# Altium PCB amirali_hasanadeh.PcbDoc
Units mm, origin at the board's own origin, x right, y up, seen from the top; angles counter-clockwise.
Board outline 105.41 x 72.64 mm, 2 copper layers (Top Layer, Bottom Layer); 28 components, 23 nets, 114 pads, 13 vias.
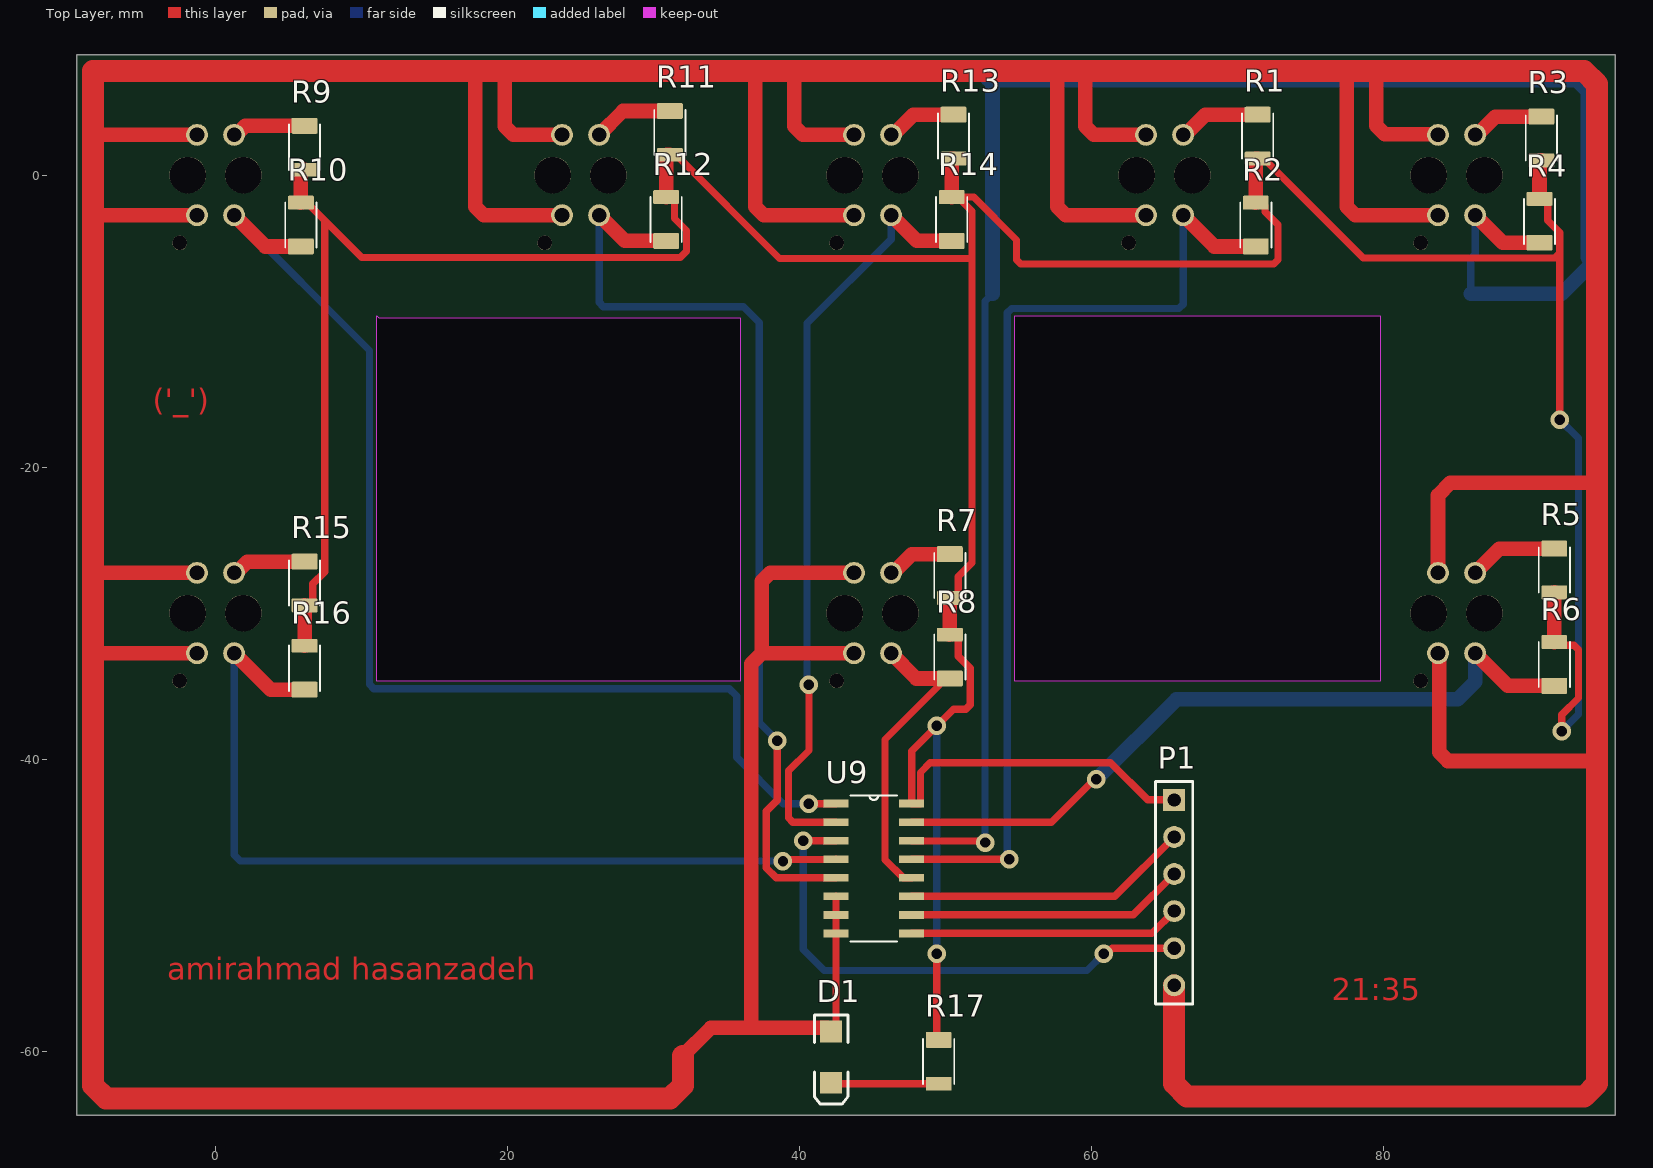
[diagram p0: Top Layer view]
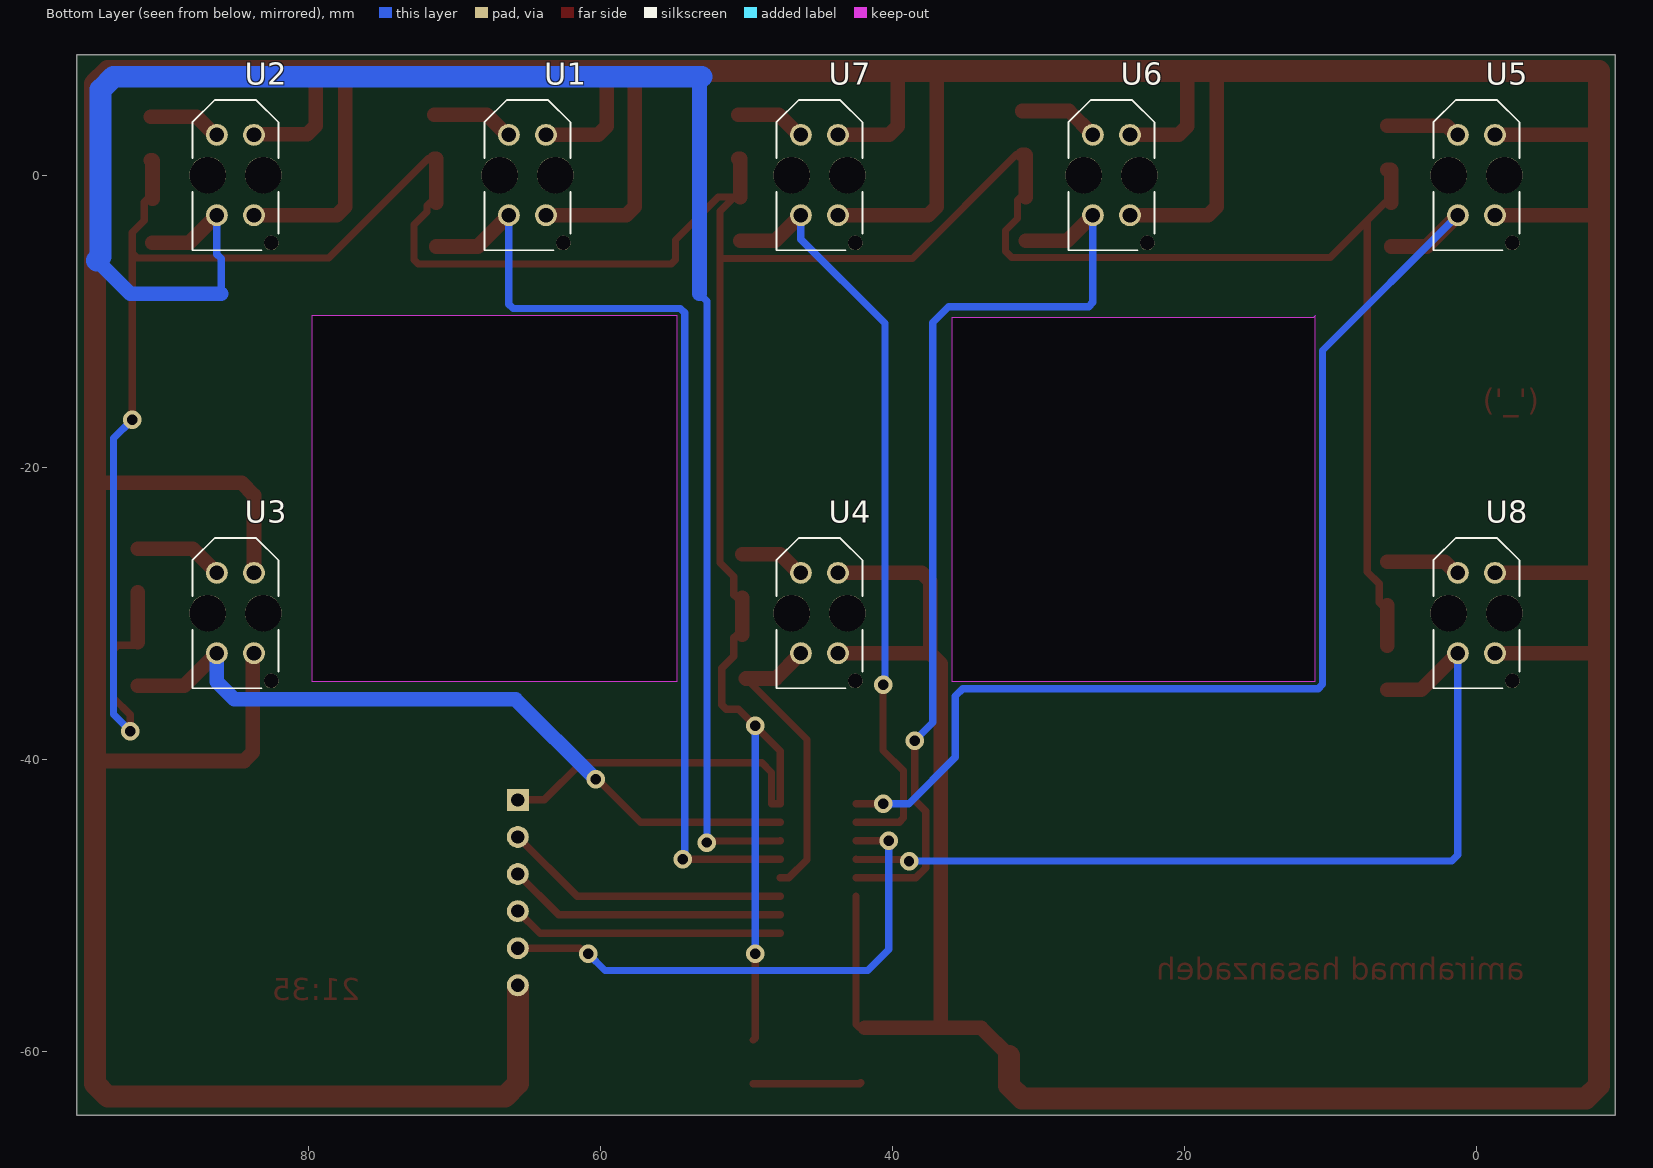
[diagram p1: Bottom Layer view, seen from below]
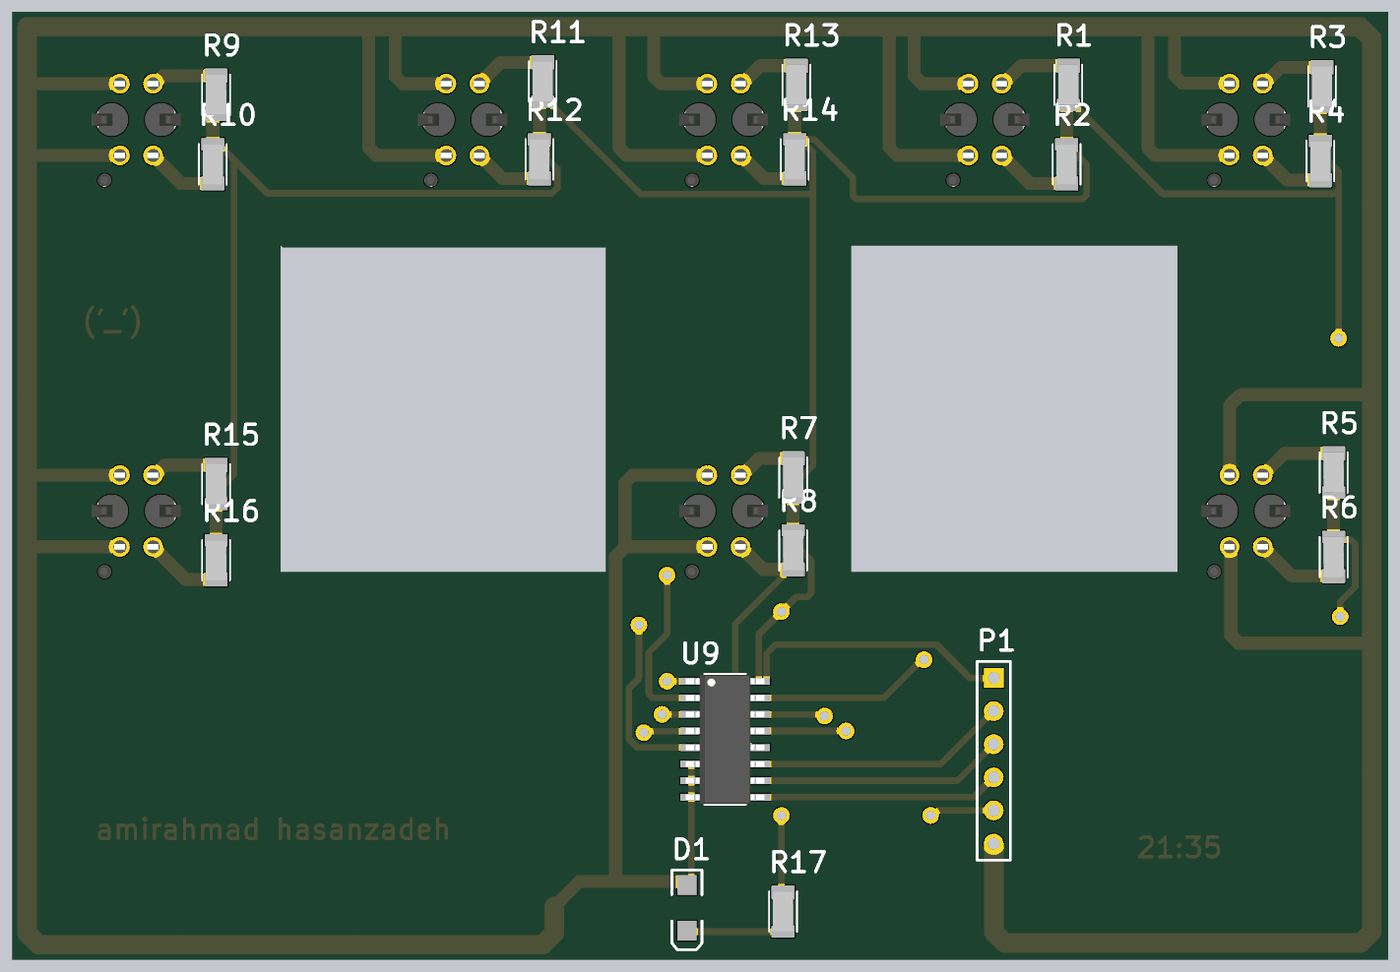
[diagram p2: 3D render of the assembled board from above, using the file's embedded part models]
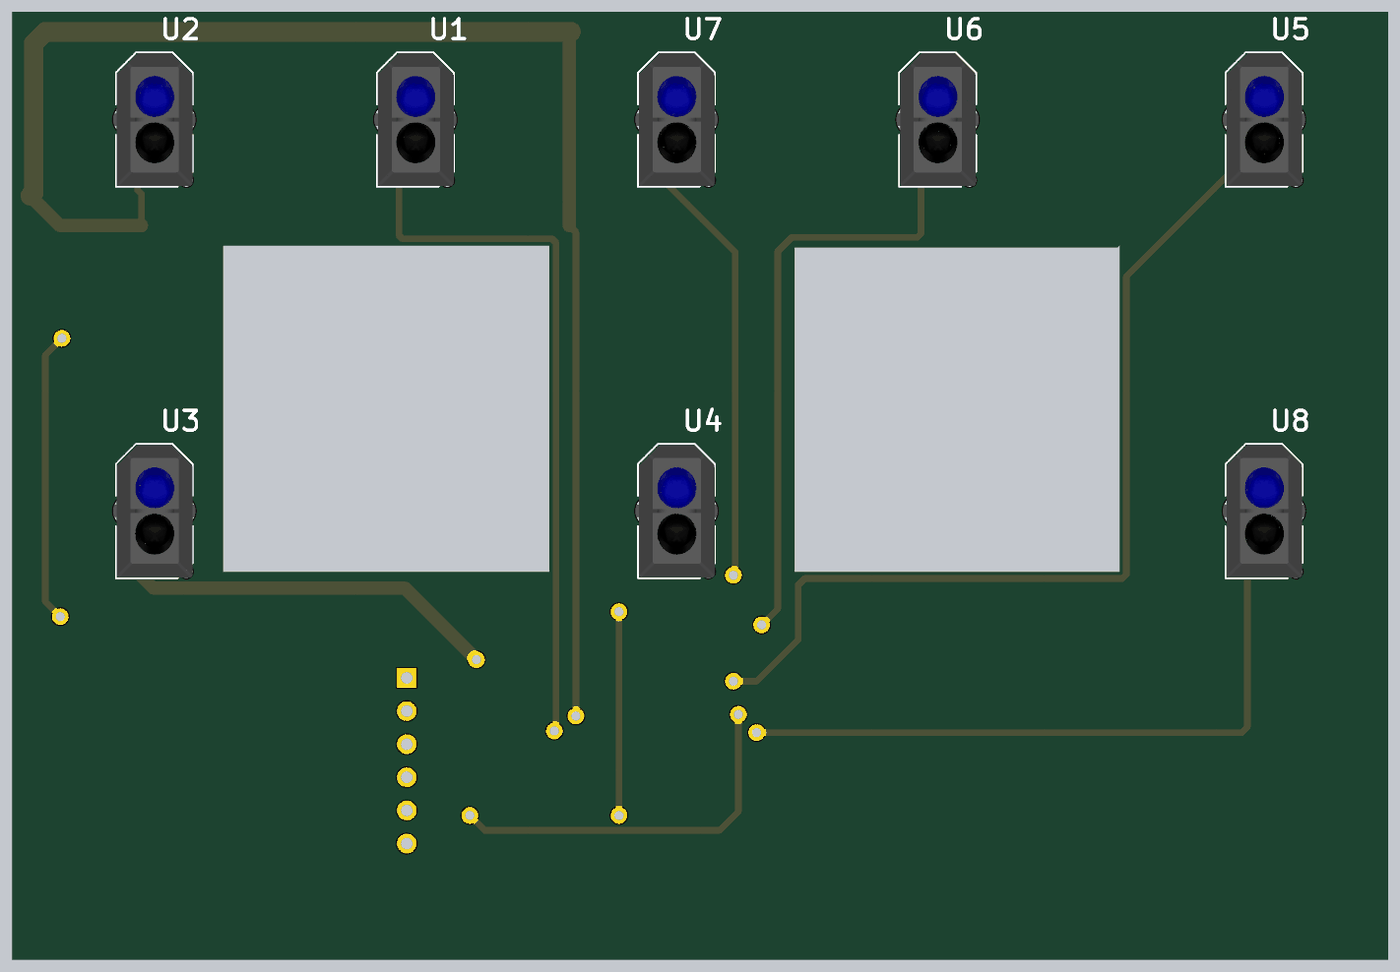
[diagram p3: 3D render of the assembled board from below, using the file's embedded part models]

## Layer stack, top to bottom
Top Solder: solder mask 0.0102, Solder Resist, Dk 3.5
Top Layer: signal copper 0.0356
Dielectric 1: dielectric 0.32, FR-4, Dk 4.8
Bottom Layer: signal copper 0.0356
Bottom Solder: solder mask 0.0102, Solder Resist, Dk 3.5

## Board outline
-9.525,-64.389 95.885,-64.389 95.885,8.255 -9.525,8.255
cut-out: 54.737,-9.652 79.756,-9.652 79.756,-34.671 54.737,-34.671
cut-out: 11.049,-9.652 11.176,-9.779 35.941,-9.779 35.941,-34.671 11.049,-34.671

## Design rules (kind name [scope] priority, off if disabled: settings)
Clearance [All] p1: gap=0.254 ignorepadtopadclearanceinfootprint=FALSE except(0: Arc-Hole Track-Hole SMDPad-Hole THPad-Hole Via-Hole Fill-Hole Poly-Hole Region-Hole Text-Hole)
PolygonConnect [All] p1: connectstyle=Relief reliefconductorwidth=0.254 reliefentries=4 polygonreliefangle="90 Angle" airgapwidth=0.254
RoutingVias [All] p1: holewidth=0.711 width=1.27 viastyle="Through Hole" minholewidth=0.711 minwidth=1.27 maxholewidth=0.711 maxwidth=1.27
SolderMaskExpansion [All] p1: expansion=0.102 istentingtop=FALSE
Width [All] p1: maxlimit=1.5 minlimit=0.5 preferedwidth=1 minimp=50.000000 maximp=50.000000 favimp=50.000000
30 further rules are at their usual default settings.

## Components (designator, comment, footprint, x,y, rotation, side; value= is the part's Value field where it differs from the comment)
D1 "LED2" 3.2X1.6X1.1 42.164,-60.424 r270 top
P1 "Header 6" HDR1X6 65.659,-42.799 r270 top
R1 "4-1879462-2" RESC3115X65N 71.374,2.667 r270 top
R2 "4-1879462-2" RESC3115X65N 71.247,-3.429 r90 top
R3 "4-1879462-2" RESC3115X65N 90.805,2.54 r270 top
R4 "4-1879462-2" RESC3115X65N 90.678,-3.175 r90 top
R5 "4-1879462-2" RESC3115X65N 91.694,-27.051 r270 top
R6 "4-1879462-2" RESC3115X65N 91.694,-33.528 r90 top
R7 "4-1879462-2" RESC3115X65N 50.292,-27.432 r270 top
R8 "4-1879462-2" RESC3115X65N 50.292,-33.02 r90 top
R9 "4-1879462-2" RESC3115X65N 6.096,1.905 r270 top
R10 "4-1879462-2" RESC3115X65N 5.842,-3.429 r90 top
R11 "4-1879462-2" RESC3115X65N 31.115,2.921 r270 top
R12 "4-1879462-2" RESC3115X65N 30.861,-3.048 r90 top
R13 "4-1879462-2" RESC3115X65N 50.546,2.667 r270 top
R14 "4-1879462-2" RESC3115X65N 50.419,-3.048 r90 top
R15 "4-1879462-2" RESC3115X65N 6.096,-27.94 r270 top
R16 "4-1879462-2" RESC3115X65N 6.096,-33.782 r90 top
R17 "4-1879462-2" RESC3115X65N 49.53,-60.706 r270 top
U1 "TCRT5000" OPTO_TCRT5000 65,0 r90 bottom
U2 "TCRT5000" OPTO_TCRT5000 85,0 r90 bottom
U3 "TCRT5000" OPTO_TCRT5000 85,-30 r90 bottom
U4 "TCRT5000" OPTO_TCRT5000 45,-30 r90 bottom
U5 "TCRT5000" OPTO_TCRT5000 0,0 r90 bottom
U6 "TCRT5000" OPTO_TCRT5000 25,0 r90 bottom
U7 "TCRT5000" OPTO_TCRT5000 45,0 r90 bottom
U8 "TCRT5000" OPTO_TCRT5000 0,-30 r90 bottom
U9 "74HC4051D" SOIC127P600X175-16N 45.085,-47.498 r0 top

## Footprints (in the part's own frame and the unit in brackets; to place one, negate y for a bottom-side part, rotate by r counter-clockwise, add the part's x,y. Pads: shape width x height; smd on the part's side, far side on the other; paste and mask are expansions set on the pad)
3.2X1.6X1.1 [mm] "SMT LED; 2 Flat Leads"
  rect 1.5x1.5 smd: 1(-1.75,0) 2(1.75,0)
  silkscreen extent -2.9,-1.15 3.2,1.15
HDR1X6 [mm] "Connector; Header; 6 Position"
  rect 1.5x1.5 hole 0.9: 1(0,0)
  round 1.5 hole 0.9: 2(2.54,0) 3(5.08,0) 4(7.62,0) 5(10.16,0) 6(12.7,0)
  silkscreen extent -1.27,-1.27 13.97,1.27
OPTO_TCRT5000 [mm]
  round 1.5 hole 1: A(2.75,1.27) CATH(2.75,-1.27) COLL(-2.75,1.27) E(-2.75,-1.27)
  round 1 hole 1 unplated: ""(-4.65,-2.45)
  round 2.5 hole 2.5 unplated: ""(0,-1.9) ""(0,1.9)
  silkscreen extent -5.15,-2.95 5.15,2.95, body extent -5.1,-3.43 5.1,3.37, height 7.2
RESC3115X65N [mm]
  rrect14% 1.09x1.77 smd: 1(-1.465,0)
  rrect14% 0.94x1.77 smd: 2(1.54,0)
  silkscreen extent -1.55,-1.06 1.55,1.06, body extent -1.55,-0.77 1.55,0.77, height 0.53
SOIC127P600X175-16N [mil]
  rect 67x21 smd: 1(-102,175) 2(-102,125) 3(-102,75) 4(-102,25) 5(-102,-25) 6(-102,-75) 7(-102,-125) 8(-102,-175) 9(102,-175) 10(102,-125) 11(102,-75) 12(102,-25) 13(102,25) 14(102,75) 15(102,125) 16(102,175)
  silkscreen extent -62,-197 62,197, body extent -118,-195 118,195, height 69

## Part data
D1: "Typical RED, GREEN, YELLOW, AMBER GaAs LED", LatestRevisionDate=17-Jul-2002, LatestRevisionNote="Re-released for DXP Platform.", PackageDescription="SM LED; 2 Flat Leads", PackageReference=3.2X1.6X1.1, PackageVersion=Feb-2002, Published=8-Jun-2000, Publisher="Altium Limited"
P1: "Header, 6-Pin", LatestRevisionDate=17-Jul-2002, LatestRevisionNote="Re-released for DXP Platform.", Publisher="Altium Limited"
R1 R2 R3 R4 R5 R6 R7 R8 R9 R10 R11 R12 R13 R14 R15 R16 R17: "RES 0.82 OHM 1% 1/4W 1206", Package=1206, Power_Rating=".25 W", Resistance=82, Tolerance=1%, Availability="In Stock", Check_prices=https://www.snapeda.com/parts/4-1879462-2/TE+Connectivity/view-part/?ref=eda, EU_RoHS_Compliance="Compliant with Exemptions", MF="TE Connectivity", MP=4-1879462-2, Price=None, SnapEDA_Link=https://www.snapeda.com/parts/4-1879462-2/TE+Connectivity/view-part/?ref=snap
U1 U2 U3 U4 U5 U6 U7 U8: "950 nm 60 mA Through Hole Reflective Optical Sensor with Transistor Output", Package=None, Availability=Unavailable, MP=TCRT5000, Price=None
U9: "1 Circuit IC Switch 8:1 130Ohm 16-SOIC", Package="SOIC-16 Toshiba", Availability="In Stock", Check_prices=https://www.snapeda.com/parts/74HC4051D/Toshiba/view-part/?ref=eda, MF=Toshiba, MP=74HC4051D, Price=None, Purchase-URL=https://pricing.snapeda.com/search/part/74HC4051D/?ref=eda, SnapEDA_Link=https://www.snapeda.com/parts/74HC4051D/Toshiba/view-part/?ref=snap

## Via types
v1: diameter 1.27, hole 0.711, Top Layer to Bottom Layer, 13 vias

## Nets (pads, with @x,y where several pads share a name; then routed paths per layer and width w, separated by ;. In a path a pad name is that pad's centre, name@x,y a point inside that pad or via, vN(x,y) a via of type N, cw(c..) or ccw(c..) an arc to the next point about the centre after c; other vN are vias at no path point)
5: P1.1 R1.2 R2.2 R3.2 R4.2 R5.2 R6.2 R7.2 R8.2 R9.2 R10.2 R11.2 R12.2 R13.2 R14.2 R15.2 R16.2 R17.1 U9.16 | length 292.3
  Top Layer w0.5: R10.2 6.257,-1.889 7.485,-3.117 ; R15.2 6.445,-29.48 6.665,-29.26 6.665,-28.004 7.485,-27.184 7.485,-3.117 ; R12.2 31.21,-1.508 31.43,-1.728 31.43,-2.984 32.25,-3.804 32.25,-5.222 31.818,-5.654 10.022,-5.654 7.485,-3.117 ; R11.2 31.53,1.381 38.626,-5.715 51.808,-5.715 ; v1(49.403,-53.344) 49.403,-59.114 R17.1 ; R8.2 50.641,-31.48 50.861,-31.7 50.861,-32.956 51.681,-33.776 51.681,-36.291 51.388,-36.584 50.538,-36.584 47.676,-39.446 U9.16 48.26,-43.053 48.277,-43.036 48.277,-40.918 48.935,-40.259 61.301,-40.259 63.841,-42.799 P1.1 ; R7.2 50.641,-28.972 50.861,-28.752 50.861,-27.496 51.808,-26.549 51.808,-5.715 ; R14.2 R14.2@50.834,-1.508 ; R2.2 71.662,-1.889 71.882,-2.109 71.882,-2.524 72.771,-3.413 72.771,-5.803 72.478,-6.096 55.157,-6.096 54.864,-5.803 54.864,-4.445 51.927,-1.508 R14.2@50.834,-1.508 ; R1.2 71.789,1.127 78.605,-5.689 91.727,-5.689 92.067,-5.349 ; R4.2 91.027,-1.635 91.247,-1.855 91.247,-3.111 92.075,-3.939 v1(92.075,-16.764) ; R6.2 91.914,-32.208 93.041,-32.208 93.345,-32.512 93.345,-35.814 92.202,-36.957 v1(92.202,-38.1) ; R14.2@50.834,-1.508 51.808,-2.482 51.808,-5.715
  Top Layer w1: R10.2 5.842,0.335 5.872,0.365 R9.2 ; R16.2 R15.2 ; R12.2 30.861,1.351 30.891,1.381 R11.2 ; R8.2 R7.2 ; R14.2 50.419,1.097 50.449,1.127 R13.2 ; R2.2 71.247,1.097 71.277,1.127 R1.2 ; R4.2 90.678,0.97 90.708,1 R3.2 ; R6.2 R5.2
  Bottom Layer w0.5: v1(49.403,-53.344) v1(49.403,-37.719) ; v1(92.075,-16.764) 93.345,-18.034 93.345,-36.931 92.202,-38.074 v1(92.202,-38.1)
GND: D1.1 P1.6 U1.CATH U1.E U2.CATH U2.E U3.CATH U3.E U4.CATH U4.E U5.CATH U5.E U6.CATH U6.E U7.CATH U7.E U8.CATH U8.E U9.6 U9.7 U9.8 | length 543.9
  Top Layer w0.5: D1.1@41.885,-58.395 42.274,-58.395 42.494,-58.174 U9.8 U9.7 U9.6
  Top Layer w1: -8.382,-32.893 -8.239,-32.75 U8.E ; -8.382,-27.305 -8.327,-27.25 U8.CATH ; -8.382,-2.667 -8.299,-2.75 U5.E ; -8.382,2.667 -8.299,2.75 U5.CATH ; 18.034,7.112 17.78,6.858 17.78,-2.164 18.366,-2.75 U6.E ; 19.939,7.112 19.812,6.985 19.812,3.336 20.398,2.75 U6.CATH ; 32.004,-60.325 33.934,-58.395 36.703,-58.395 ; 37.211,7.112 36.957,6.858 36.957,-2.164 37.543,-2.75 U7.E ; 39.624,7.112 39.624,3.336 40.21,2.75 U7.CATH ; D1.1@41.885,-58.395 36.703,-58.395 ; U4.E 37.416,-32.75 ; U4.CATH 38.002,-27.25 37.416,-27.836 37.416,-32.75 ; 57.658,7.112 57.658,-2.164 58.244,-2.75 U1.E ; 59.69,7.112 59.563,6.985 59.563,3.336 60.149,2.75 U1.CATH ; 77.343,7.112 77.47,6.985 77.47,-2.164 78.056,-2.75 U2.E ; 79.756,7.112 79.502,6.858 79.502,3.38 80.088,2.794 83.686,2.794 U2.CATH ; U3.E 83.82,-32.84 83.82,-39.546 84.406,-40.132 94.615,-40.132 ; U3.CATH 83.73,-21.934 84.582,-21.082 94.615,-21.082 ; 36.703,-58.395 36.703,-33.463 37.416,-32.75
  Top Layer w1.5: 32.004,-60.325 32.004,-62.367 31.125,-63.246 -7.503,-63.246 -8.382,-62.367 -8.382,-32.893 -8.382,-27.305 -8.382,-2.667 -8.382,2.667 -8.382,7.112 18.034,7.112 19.939,7.112 37.211,7.112 39.624,7.112 57.658,7.112 59.69,7.112 77.343,7.112 79.756,7.112 93.736,7.112 94.615,6.233 94.615,-21.082 94.615,-40.132 94.615,-62.24 93.736,-63.119 66.538,-63.119 65.659,-62.24 P1.6
NetD1_2: D1.2 R17.2 | length 7.4
  Top Layer w0.5: D1.2 42.236,-62.246 R17.2
NetR1_1: R1.1 U1.A | length 5.7
  Top Layer w1: U1.A 66.405,2.75 67.787,4.132 R1.1
NetR3_1: R3.1 U2.A | length 5.1
  Top Layer w1: U2.A 86.405,2.75 87.66,4.005 R3.1
NetR5_1: R5.1 U3.A | length 6.1
  Top Layer w1: U3.A 87.934,-25.586 R5.1
NetR7_1: R7.1 U4.A | length 4.6
  Top Layer w1: U4.A 46.405,-27.25 47.688,-25.967 R7.1
NetR9_1: R9.1 U5.A | length 5.1
  Top Layer w1: U5.A 1.405,2.75 2.025,3.37 R9.1
NetR11_1: R11.1 U6.A | length 5.5
  Top Layer w1: U6.A 27.906,4.386 R11.1
NetR13_1: R13.1 U7.A | length 4.8
  Top Layer w1: U7.A 46.405,2.75 47.787,4.132 R13.1
NetR15_1: R15.1 U8.A | length 5.1
  Top Layer w1: U8.A 1.405,-27.25 2.18,-26.475 R15.1
out: P1.5 U9.3 | length 36.3
  Top Layer w0.5: v1(40.259,-45.593) U9.3 ; v1(60.833,-53.34) 61.041,-53.34 61.422,-52.959 P1.5
  Bottom Layer w0.5: v1(40.259,-45.593) 40.259,-53.047 41.695,-54.483 59.69,-54.483 v1(60.833,-53.34)
s0: P1.2 U9.11 | length 19.7
  Top Layer w0.5: U9.11 61.595,-49.403 P1.2
s1: P1.3 U9.10 | length 19.1
  Top Layer w0.5: U9.10 62.865,-50.673 P1.3
s2: P1.4 U9.9 | length 18.6
  Top Layer w0.5: U9.9 64.135,-51.943 P1.4
Y0: R2.1 U1.COLL U9.13 | length 68.4
  Top Layer w0.5: U9.13 v1(54.356,-46.863)
  Top Layer w1: U1.COLL 68.414,-4.894 R2.1
  Bottom Layer w0.5: v1(54.356,-46.863) 54.233,-46.74 54.233,-9.443 54.528,-9.148 65.977,-9.148 66.27,-8.855 U1.COLL
Y1: R4.1 U2.COLL U9.14 | length 131.3
  Top Layer w0.5: U9.14 47.693,-45.61 52.595,-45.61 v1(52.705,-45.72)
  Top Layer w1: U2.COLL 88.16,-4.64 R4.1
  Bottom Layer w0.5: v1(52.705,-45.72) 52.705,-8.636 53.213,-8.128 ; 85.979,-8.128 85.979,-5.72 86.27,-5.429 U2.COLL
  Bottom Layer w1: 53.086,6.731 53.213,6.604 53.213,-8.128 ; 85.979,-8.128 92.202,-8.128 94.488,-5.842
  Bottom Layer w1.5: 53.086,6.731 93.355,6.731 94.234,5.852 94.234,-5.588 94.488,-5.842
Y2: R6.1 U3.COLL U9.15 | length 50.9
  Top Layer w0.5: U9.15 57.25,-44.323 60.175,-41.398 v1(60.325,-41.398)
  Top Layer w1: U3.COLL 88.513,-34.993 R6.1
  Bottom Layer w1: v1(60.325,-41.398) 65.819,-35.904 85.086,-35.904 86.27,-34.72 U3.COLL
Y3: R8.1 U4.COLL U9.12 | length 21.3
  Top Layer w0.5: U9.12 47.092,-48.133 45.847,-46.888 45.847,-38.666 49.657,-34.856 49.657,-34.78 49.952,-34.485 50.028,-34.485 R8.1
  Top Layer w1: U4.COLL 48.005,-34.485 R8.1@50.028,-34.485
Y4: R10.1 U5.COLL U9.1 | length 79.2
  Top Layer w0.5: v1(40.64,-43.053) U9.1
  Top Layer w1: U5.COLL 3.414,-4.894 R10.1
  Bottom Layer w0.5: U5.COLL 10.541,-12.021 10.541,-34.886 10.834,-35.179 35.179,-35.179 35.687,-35.687 35.687,-39.878 38.862,-43.053 v1(40.64,-43.053)
Y5: R12.1 U6.COLL U9.5 | length 66.1
  Top Layer w0.5: v1(38.481,-38.735) 38.481,-42.824 37.723,-43.582 37.723,-47.462 38.394,-48.133 U9.5
  Top Layer w1: U6.COLL 28.033,-4.513 R12.1
  Bottom Layer w0.5: U6.COLL 26.27,-8.724 26.563,-9.017 36.156,-9.017 37.245,-10.106 37.245,-37.499 v1(38.481,-38.735)
Y6: R14.1 U7.COLL U9.2 | length 52.5
  Top Layer w0.5: v1(40.64,-34.925) 40.64,-39.414 39.243,-40.811 39.243,-44.03 39.536,-44.323 U9.2
  Top Layer w1: U7.COLL 48.033,-4.513 R14.1
  Bottom Layer w0.5: v1(40.64,-34.925) 40.513,-34.798 40.513,-10.16 46.27,-4.403 U7.COLL
Y7: R16.1 U8.COLL U9.4 | length 61.1
  Top Layer w0.5: v1(38.862,-46.99) 38.972,-46.88 42.477,-46.88 U9.4
  Top Layer w1: U8.COLL 3.767,-35.247 R16.1
  Bottom Layer w0.5: U8.COLL 1.27,-46.57 1.69,-46.99 v1(38.862,-46.99)
pads on no net: U1. U2. U3. U4. U5. U6. U7. U8.

## Other copper
Top Layer:
  text "('_')" at -4.318,-16.129 h1.52
  text "amirahmad hasanzadeh" at -3.302,-55.118 h1.52
  text "21:35" at 76.454,-56.515 h1.52

## Silkscreen, mask and mechanical layers (free items; w line width, h text height)
Mechanical 1:
  lines w0.254: 79.629,-9.652 54.737,-9.652 ; 11.049,-9.652 36.049,-9.652 ; 11.049,-9.652 11.049,-34.652 36.049,-34.652 36.049,-9.652 ; 11.049,-9.652 36.049,-9.652 ; 54.737,-9.652 54.737,-34.652 79.737,-34.652 79.737,-9.652 54.737,-9.652 ; -9.525,-64.389 93.853,-64.389 95.885,-64.389 95.885,-63.5 95.885,8.128 95.885,8.255 -9.525,8.255 -9.525,-64.389